# EAGLE board NFCStamp (EAGLE 8.5.1)
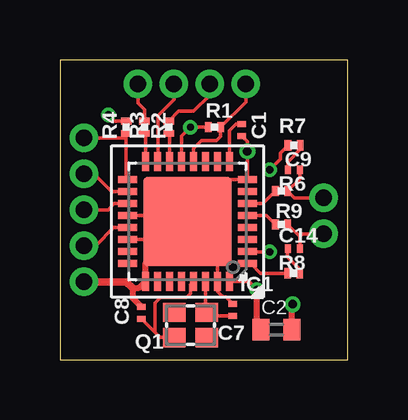
[diagram p0: board, top side]
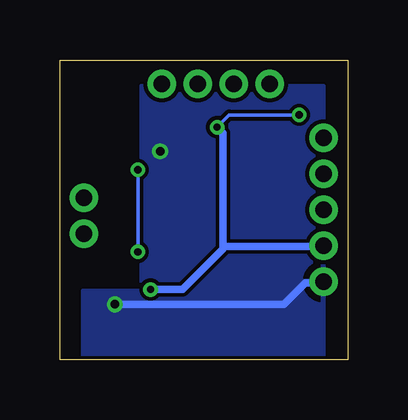
[diagram p1: board, bottom side, seen from below]

Size 12 x 12.5 mm. Coordinates in mm from the lower left corner, seen from the top.
Outline: 0,0 12,0 12,12.5 0,12.5 0,0
Copper layers (1*16): Top 0.035mm / dielectric 0.6mm / Bottom 0.035mm
Design rules "default *": minimum track width 6mil, minimum drill 0.3mm, track to track 6mil, track to pad 6mil, pad to pad 6mil, via to via 6mil, smd to smd 6mil, copper to edge 6mil, drill to drill 6mil, minimum pad ring 10mil, minimum via ring 6mil, stop-mask expansion 4mil, vias tented up to drill 0mil, thermal gap 10mil

## Footprints (pad centres in the part's own frame; a part is rotated, then mirrored left to right if it is on the bottom)
C0201 = smd 0.25 x 0.35: 1 -0.25,0; 2 0.25,0
C0402 = smd 0.7 x 0.9: 1 -0.65,0; 2 0.65,0
QFN32(5X5) = smd 0.8 x 0.3: 1 -2.5,1.75; 2 -2.5,1.25; 3 -2.5,0.75; 4 -2.5,0.25; 5 -2.5,-0.25; 6 -2.5,-0.75; 7 -2.5,-1.25; 8 -2.5,-1.75; 17 2.5,-1.75; 18 2.5,-1.25; 19 2.5,-0.75; 20 2.5,-0.25; 21 2.5,0.25; 22 2.5,0.75; 23 2.5,1.25; 24 2.5,1.75 | smd 0.3 x 0.8: 9 -1.75,-2.5; 10 -1.25,-2.5; 11 -0.75,-2.5; 12 -0.25,-2.5; 13 0.25,-2.5; 14 0.75,-2.5; 15 1.25,-2.5; 16 1.75,-2.5; 25 1.75,2.5; 26 1.25,2.5; 27 0.75,2.5; 28 0.25,2.5; 29 -0.25,2.5; 30 -0.75,2.5; 31 -1.25,2.5; 32 -1.75,2.5 | smd 3.7 x 3.7: 33 0,0
2.0X1.6_KX-5 = smd 0.95 x 0.8: 1 -0.675,-0.525; 2 0.675,-0.525; 3 0.675,0.525; 4 -0.675,0.525
R0201 = smd 0.28 x 0.43: 1 -0.255,0; 2 0.255,0
B4B-ZR = drill 0.7 pad 1.1: 1 -2.25,0; 2 -0.75,0
B3B-ZR = drill 0.7 pad 1.1: 1 -2.25,0; 2 -0.75,0; 3 0.75,0
B2B-ZR = drill 0.7 pad 1.1: 1 -2.25,0; 2 -0.75,0
B4B-ZR' = drill 0.7 pad 1.1: 1 -2.25,0; 2 -0.75,0; 3 0.75,0; 4 2.25,0

## Placement (x,y rotation side)
C1  1000pF  [C0201]  7.59,9.57 90 top
C2  10uF  [C0402]  9.03,1.25 0 top
C7  15pF  [C0201]  7.21,2.08 90 top
C8  15pF  [C0201]  3.4,1.95 90 top
C9  150pF  [C0201]  9.75,7.92 0 top
C14  150pF  [C0201]  9.75,4.62 0 top
IC1  CR95HF  [QFN32(5X5)]  5.32,5.76 180 top
Q1  27.12MHz  [2.0X1.6_KX-5]  5.45,1.44 0 top
R1  3.3k  [R0201]  6.45,9.7 0 top
R2  270  [R0201]  4.54,9.7 90 top
R3  270  [R0201]  3.53,9.7 90 top
R4  3.3k  [R0201]  2.76,9.7 90 top
R6  270  [R0201]  9.24,7.03 180 top
R7  0  [R0201]  9.77,8.94 180 top
R8  0  [R0201]  9.75,3.6 180 top
R9  270  [R0201]  9.24,5.63 180 top
X1  B4B-ZR  [B4B-ZR]  1,7 270 top
X2  B3B-ZR  [B3B-ZR]  1,4 270 top
X3  B2B-ZR  [B2B-ZR]  11,4.5 270 top
X4  B4B-ZR  [B4B-ZR']  5.5,11.5 180 top

## Library data of the parts
C1 C2 C7-C9 C14 = eagle-ltspice; SPICEMODEL: NONE; SPICEPREFIX: C
IC1 X1 = Misaka-IC
Q1 = crystal-geyer_V1_0
R1-R4 R6-R9 = eagle-ltspice; SPICEMODEL: NONE; SPICEPREFIX: R
X2 X4 = BM019; MF: FARNELL; MPN: B4B-ZR(LF)(SN); OC_FARNELL: 1830916; OC_NEWARK: 37K9960
X3 = BM019

## Nets
0: C1.1 C2.2 C7.2 C8.2 IC1.8 IC1.20 IC1.22 IC1.25 IC1.31 IC1.33 X2.3
N$1: C1.2 IC1.9
N$2: IC1.19 X2.1
N$3: R2.2 X4.2
N$4: C9.2 R6.1 X3.1
N$5: IC1.6 R6.2
N$6: IC1.16 R3.1
N$7: IC1.14 R2.1
N$8: IC1.17 R4.1 X1.1
N$9: IC1.18 X1.2
N$10: R3.2 X4.4
N$11: IC1.12 R1.2 X4.1
N$12: C8.1 IC1.29 Q1.1
N$13: C7.1 IC1.30 Q1.3
N$15: IC1.5 R9.2
N$16: IC1.15 X4.3
N$18: C14.2 R9.1 X3.2
N$20: C9.1 R7.1
N$21: C14.1 R8.1
N$22: IC1.2 R7.2
N$23: IC1.1 R8.2
VDD: C2.1 IC1.13 IC1.21 IC1.32 R1.1 R4.2 X2.2

## Tracks (layer width: path | path; a pad name or v marks a point on that pad's centre or on a via)
0  (via drill 0.35)
  Top 0.152: IC1.33 6.57,4.51 IC1.31 6.57,2.85 6.81,2.61 6.93,2.61 C7.2 | C1.1 7.82,9.09 v7.82,8.69 IC1.8 6.94,7.51 6.59,7.16 6.57,7.18 | IC1.22 4.04,5.01 4.3,4.74 | 6.57,7.28 6.57,7.18 | 6.57,7.18 6.57,7.03 5.32,7.03 | IC1.33 5.32,6.01 IC1.20 | 5.32,7.03 4.05,7.03 | IC1.33 5.32,7.03
  Top 0.254: IC1.33 4.3,4.74 3.57,4.01 IC1.25 3.31,3 3.03,3 3.03,2.57 C8.2 | C2.2 9.68,2.28 v9.71,2.31
  Top 0.305: X2.3 2.77,3.25 3.03,3
  Bottom 0.305: X2.3 1.05,3.2 1.76,3.2 2.66,2.31 v9.71,2.31
  pour Bottom: 1,11.43 1,0 10.91,0 11.06,0 11.06,2.9 8.62,2.9 8.62,11.43
N$1
  Top 0.152: IC1.9 7.07,9.39 7.07,9.54 7.35,9.82 C1.2
N$2
  Top 0.152: IC1.19 2.26,6.51 2,6.25 X2.1
N$3
  Top 0.152: X4.2 6.25,11.04 5.57,10.36 4.95,10.36 R2.2
N$4
  Top 0.152: C9.2 10,7.53 R6.1 9.78,6.75 X3.1
N$5
  Top 0.152: IC1.6 8.47,6.51 R6.2
N$6
  Top 0.152: IC1.16 3.57,9.4 R3.1
N$7
  Top 0.152: 4.54,8.29 IC1.14 4.57,9.41 R2.1
N$8
  Top 0.152: R4.1 2.76,9.3 | 2.76,9.3 2.76,7.57 IC1.17 | X1.1 2.72,9.25 2.76,9.3
N$9
  Top 0.152: IC1.18 2.17,7.01 1.43,7.75 X1.2
N$10
  Top 0.152: R3.2 3.53,10.43 3.25,10.7 X4.4
N$11
  Top 0.152: IC1.12 5.57,8.81 5.9,9.14 6.54,9.14 6.7,9.3 R1.2 7.75,10.74 X4.1
N$12
  Top 0.152: Q1.1 4.18,0.92 3.96,1.14 | 3.96,1.14 C8.1 | IC1.29 5.45,3.14 5.45,2.77 5.28,2.6 4.2,2.6 3.96,2.36 3.96,1.14
N$13
  Top 0.152: IC1.30 6.07,2.02 Q1.3 6.26,1.83 C7.1
N$15
  Top 0.152: IC1.5 8.61,6.01 R9.2
N$16
  Top 0.152: IC1.15 4.1,8.29 4.1,10.19 4.75,10.84 X4.3
N$18
  Top 0.152: C14.2 10,5.13 | 10,5.13 R9.1 | X3.2 10.12,5.25 10,5.13
N$20
  Top 0.152: R7.1 10.02,8.77 9.5,8.25 C9.1
N$21
  Top 0.152: C14.1 9.5,4.28 10.01,3.77 R8.1
N$22  (via drill 0.3)
  Top 0.152: IC1.2 7.84,4.49 v8.75,4.49 | R7.2 9.2,8.62 9.2,8.37 v8.75,7.92
  Bottom 0.152: v8.75,4.49 v8.75,7.92
N$23
  Top 0.152: IC1.1 7.96,4.01 8.37,3.6 R8.2
VDD  (via drill 0.3)
  Top 0.152: IC1.13 5.07,9.32 v5.45,9.7 R1.1 | v2.02,10.21 2.27,9.95 R4.2 | IC1.32 7.88,3.26 v8.22,2.92 | X2.2 1.48,4.75 2.24,5.51 IC1.21
  Top 0.254: C2.1 8.22,1.42 v8.22,2.92
  Bottom 0.152: v5.45,9.7 4.94,10.21 v2.02,10.21
  Bottom 0.305: 5.21,4.72 5.21,4.61 6.89,2.92 v8.22,2.92 | 5.21,4.72 5.21,9.46 v5.45,9.7 | X2.2 1.03,4.72 5.21,4.72